# Altium PCB RS485_GPIO.PcbDoc (part 1 of 3)
Units mm, origin at the board's own origin, x right, y up, seen from the top; angles counter-clockwise.
Board outline 152.4 x 101.6 mm, 2 copper layers (Top Layer, Bottom Layer); 132 components, 100 nets, 460 pads, 0 vias.
Unrouted connection lines stored in the file: 308.
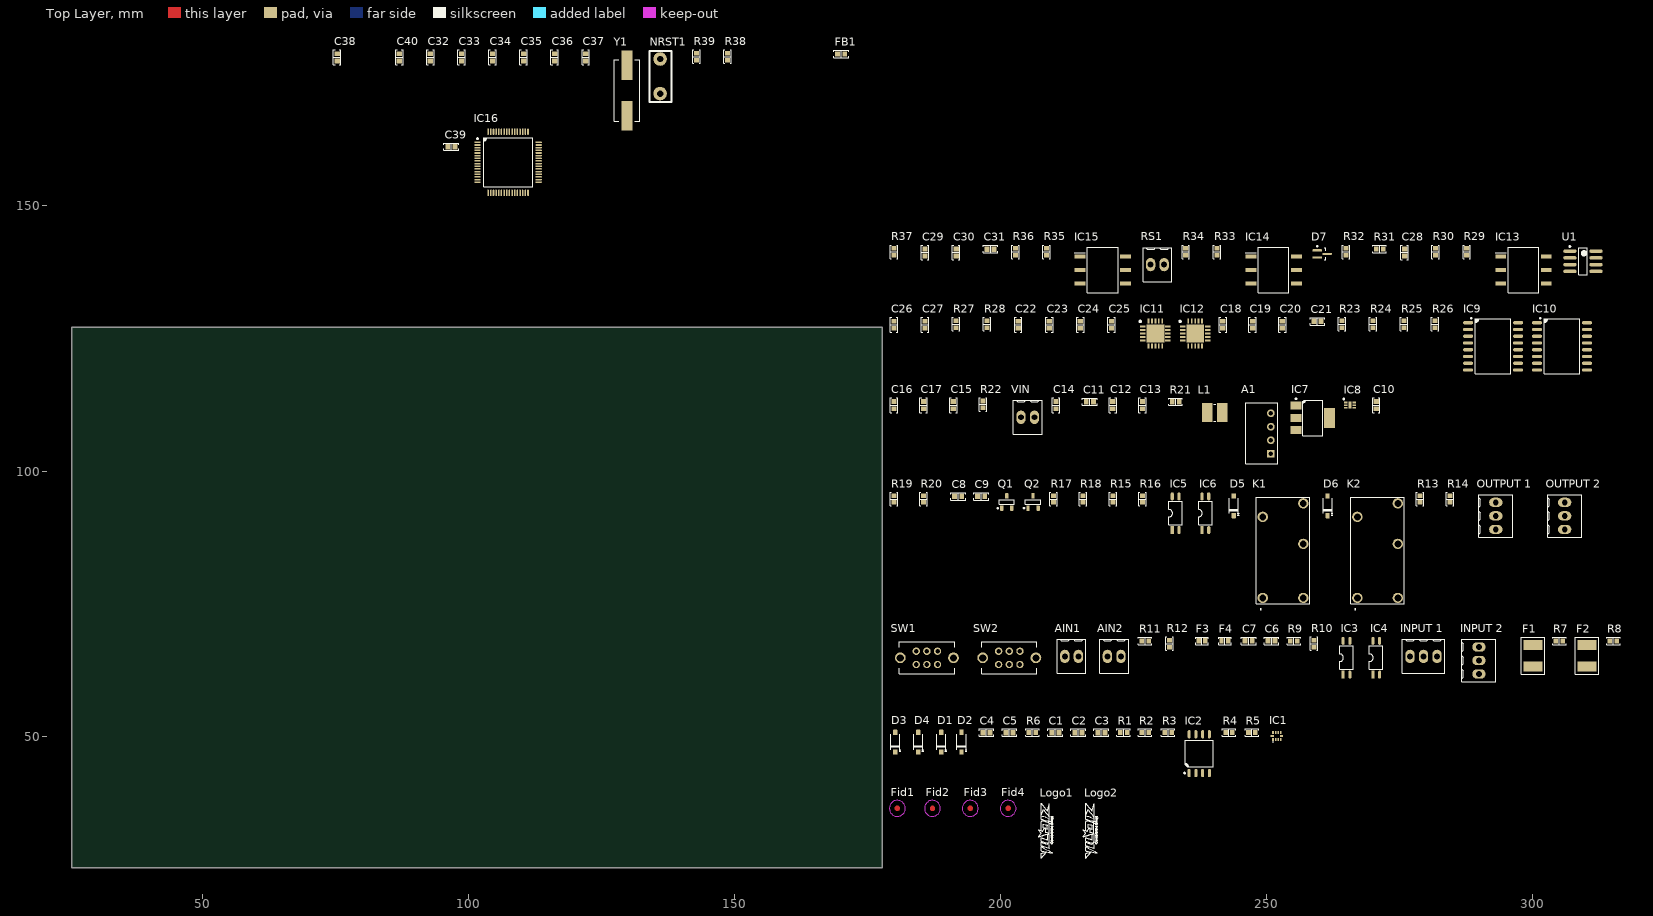
[diagram p0: Top Layer view]
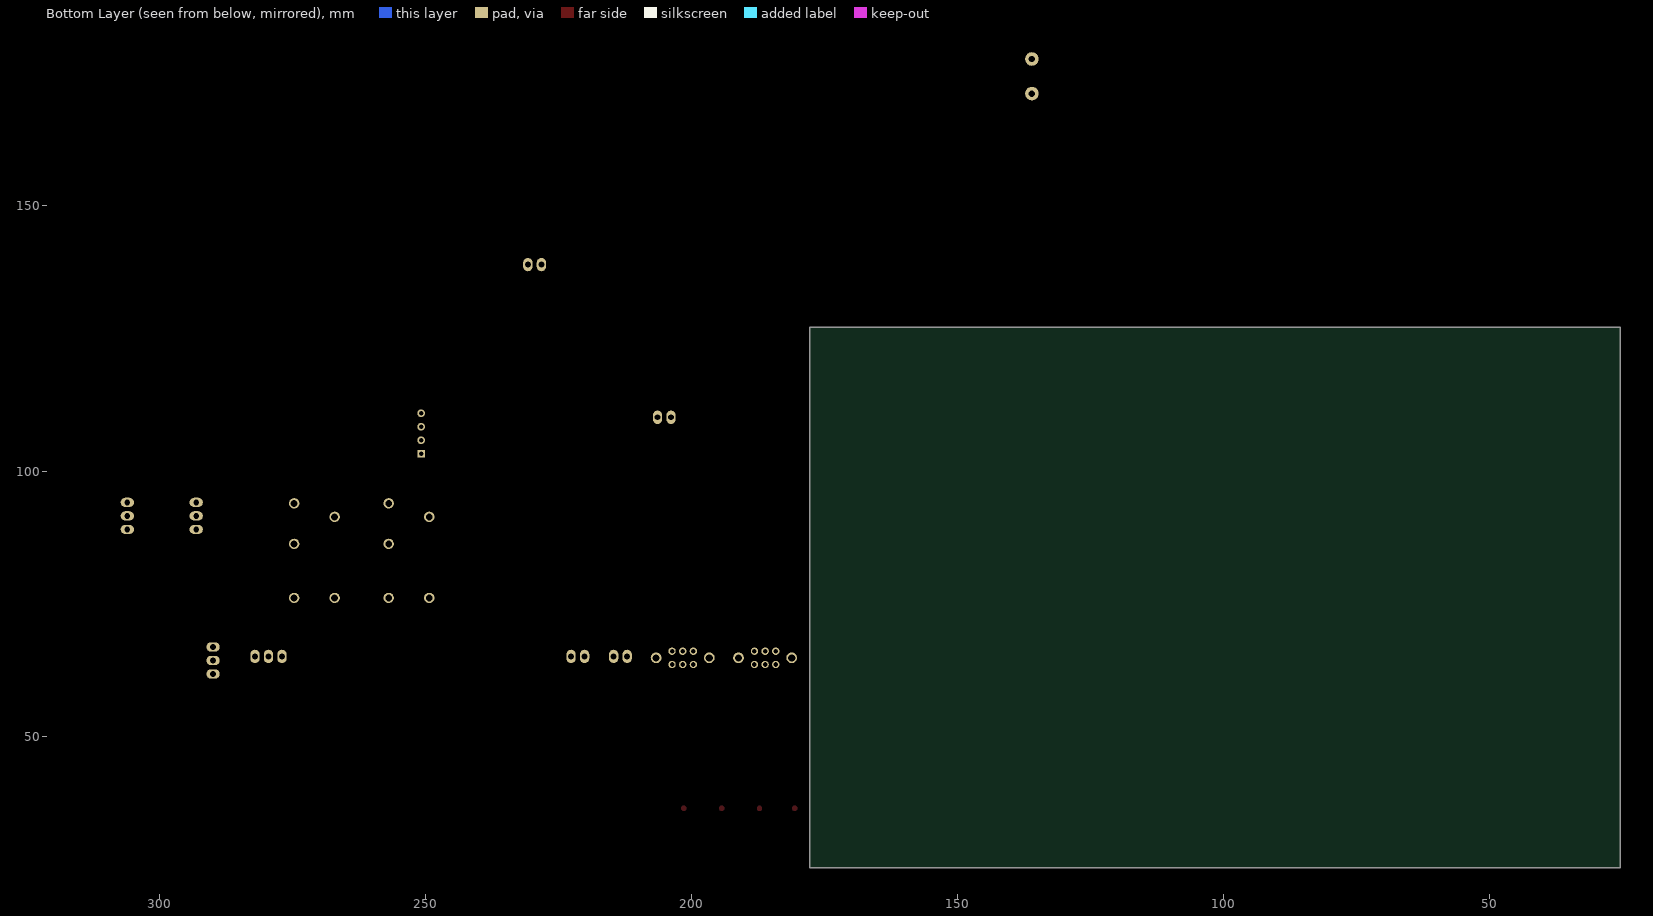
[diagram p1: Bottom Layer view, seen from below]

## Layer stack, top to bottom
Top Solder: solder mask 0.0102, Solder Resist, Dk 3.5
Top Layer: signal copper 0.0356
Dielectric 1: dielectric 0.32, FR-4, Dk 4.8
Bottom Layer: signal copper 0.0356
Bottom Solder: solder mask 0.0102, Solder Resist, Dk 3.5

## Board outline
25.4,25.4 177.8,25.4 177.8,127 25.4,127

## Design rules (kind name [scope] priority, off if disabled: settings)
Clearance [All] p1: gap=0.089 ignorepadtopadclearanceinfootprint=FALSE
DiffPairsRouting "Schematic Differential Pairs Routing" [InNetClass('RS485B')] p1: maxlimit=1 minlimit=0.127 mostfreqgap=0.3 toplayer_minwidth=0.127 toplayer_maxwidth=1 toplayer_prefwidth=0.3 bottomlayer_minwidth=0.127 bottomlayer_maxwidth=1 bottomlayer_prefwidth=0.3 maxuncoupledlength=12.7
DiffPairsRouting [All] p2: maxlimit=0.254 minlimit=0.254 mostfreqgap=0.254 toplayer_minwidth=0.381 toplayer_maxwidth=0.381 toplayer_prefwidth=0.381 bottomlayer_minwidth=0.381 bottomlayer_maxwidth=0.381 bottomlayer_prefwidth=0.381 maxuncoupledlength=12.7
PolygonConnect [All] p1: connectstyle=Relief reliefconductorwidth=0.254 reliefentries=4 polygonreliefangle="90 Angle" airgapwidth=0.254
RoomDefinition U_STM32F0 [InComponentClass('U_STM32F0')] p1: confinementstyle=ConfineIn formatcopy=TRUE lockcomponents=FALSE outline 74.26,131.004 172.812,131.004 172.812,181.971 74.26,181.971
RoomDefinition U_RS485 [InComponentClass('U_RS485')] p2: confinementstyle=ConfineIn formatcopy=TRUE lockcomponents=FALSE outline 178.943,132.842 313.944,132.842 313.944,145.288 178.943,145.288
RoomDefinition U_PT100 [InComponentClass('U_PT100')] p3: confinementstyle=ConfineIn formatcopy=TRUE lockcomponents=FALSE outline 178.943,117.856 311.658,117.856 311.658,131.699 178.943,131.699
RoomDefinition U_Power [InComponentClass('U_Power')] p4: confinementstyle=ConfineIn formatcopy=TRUE lockcomponents=FALSE outline 178.943,100.076 274.32,100.076 274.32,116.586 178.943,116.586
RoomDefinition U_Outputs [InComponentClass('U_Outputs')] p5: confinementstyle=ConfineIn formatcopy=TRUE lockcomponents=FALSE outline 178.943,72.898 314.706,72.898 314.706,98.806 178.943,98.806
RoomDefinition U_Inputs [InComponentClass('U_Inputs')] p6: confinementstyle=ConfineIn formatcopy=TRUE lockcomponents=FALSE outline 178.943,55.626 317.119,55.626 317.119,71.628 178.943,71.628
RoomDefinition U_4-20mA [InComponentClass('U_4-20mA')] p7: confinementstyle=ConfineIn formatcopy=TRUE lockcomponents=FALSE outline 178.943,41.91 254.254,41.91 254.254,54.356 178.943,54.356
RoomDefinition RS485_GPIO [InComponentClass('RS485_GPIO')] p8: confinementstyle=ConfineIn formatcopy=TRUE lockcomponents=FALSE outline 178.943,26.924 223.266,26.924 223.266,40.767 178.943,40.767
RoutingVias [All] p1: holewidth=0.711 width=1.27 viastyle="Through Hole" minholewidth=0.711 minwidth=1.27 maxholewidth=0.711 maxwidth=1.27
SolderMaskExpansion [All] p1: expansion=0.102
Width [All] p1: maxlimit=0.254 minlimit=0.254 preferedwidth=0.254
29 further rules are at their usual default settings.

## Classes and differential pairs
differential pair class RS485B: RS485B
net class RS485B: RS485B_N RS485B_P
component class U_STM32F0: C32 C33 C34 C35 C36 C37 C38 C39 C40 FB1 IC16 NRST1 R38 R39 Y1
component class U_RS485: C28 C29 C30 C31 D7 IC13 IC14 IC15 R29 R30 R31 R32 R33 R34 R35 R36 R37 RS1 U1
component class U_PT100: C18 C19 C20 C21 C22 C23 C24 C25 C26 C27 IC9 IC10 IC11 IC12 R23 R24 R25 R26 R27 R28
component class U_Power: A1 C10 C11 C12 C13 C14 C15 C16 C17 IC7 IC8 L1 R21 R22 VIN
component class U_Outputs: C8 C9 D5 D6 IC5 IC6 K1 K2 "OUTPUT 1" "OUTPUT 2" Q1 Q2 R13 R14 R15 R16 R17 R18 R19 R20
component class U_Inputs: AIN1 AIN2 C6 C7 F1 F2 F3 F4 IC3 IC4 "INPUT 1" "INPUT 2" R7 R8 R9 R10 R11 R12 SW1 SW2
component class U_4-20mA: C1 C2 C3 C4 C5 D1 D2 D3 D4 IC1 IC2 R1 R2 R3 R4 R5 R6
component class RS485_GPIO: Fid1 Fid2 Fid3 Fid4 Logo1 Logo2
differential pair RS485B: +RS485B_P -RS485B_N

## Components (designator, comment, footprint, x,y, rotation, side; value= is the part's Value field where it differs from the comment)
A1 "#NAME?" "Recom ROE1205S" 250.825,107.061 r90 top
AIN1 "2 Pin" "TE 282834-2" 213.36,65.151 r0 top
AIN2 "2 Pin" "TE 282834-2" 221.361,65.151 r0 top
C1 "100nF" "CAP 0603/1608" 210.312,50.8 r0 top
C2 "100nF" "CAP 0603/1608" 214.63,50.8 r0 top
C3 "100nF" "CAP 0603/1608" 218.948,50.8 r0 top
C4 "470nF" "CAP 0603/1608" 197.358,50.8 r0 top
C5 "470nF" "CAP 0603/1608" 201.676,50.8 r0 top
C6 "100nF" "CAP 0603/1608" 250.952,68.072 r0 top
C7 "100nF" "CAP 0603/1608" 246.634,68.072 r0 top
C8 "100nF" "CAP 0603/1608" 192.024,95.25 r0 top
C9 "100nF" "CAP 0603/1608" 196.342,95.25 r0 top
C10 "330pF" "CAP 0603/1608" 270.637,112.395 r90 top
C11 "10uF" "CAP 0603/1608" 216.789,113.03 r0 top
C12 "330nF" "CAP 0603/1608" 221.107,112.395 r90 top
C13 "1uF" "CAP 0603/1608" 226.695,112.395 r90 top
C14 "100nF" "CAP 0603/1608" 210.439,112.395 r90 top
C15 "330pF" "CAP 0603/1608" 191.135,112.395 r90 top
C16 "100nF" "CAP 0603/1608" 179.959,112.395 r90 top
C17 "1uF" "CAP 0603/1608" 185.547,112.395 r90 top
C18 "100nF" "CAP 0603/1608" 241.808,127.508 r90 top
C19 "100nF" "CAP 0603/1608" 247.396,127.508 r90 top
C20 "100nF" "CAP 0603/1608" 252.984,127.508 r90 top
C21 "100nF" "CAP 0603/1608" 259.588,128.143 r0 top
C22 "100nF" "CAP 0603/1608" 203.327,127.508 r90 top
C23 "100nF" "CAP 0603/1608" 209.169,127.508 r90 top
C24 "100nF" "CAP 0603/1608" 215.011,127.508 r90 top
C25 "100nF" "CAP 0603/1608" 220.853,127.508 r90 top
C26 "100nF" "CAP 0603/1608" 179.959,127.508 r90 top
C27 "100nF" "CAP 0603/1608" 185.801,127.508 r90 top
C28 "100nF" "CAP 0603/1608" 275.971,141.097 r90 top
C29 "100nF" "CAP 0603/1608" 185.801,141.097 r90 top
C30 "100nF" "CAP 0603/1608" 191.643,141.097 r90 top
C31 "100nF" "CAP 0603/1608" 198.12,141.732 r0 top
C32 "100nF" "CAP 0603/1608" 92.802,177.78 r90 top
C33 "100nF" "CAP 0603/1608" 98.644,177.78 r90 top
C34 "100nF" "CAP 0603/1608" 104.486,177.78 r90 top
C35 "4.7uF" "CAP 0603/1608" 110.328,177.78 r90 top
C36 "1uF" "CAP 0603/1608" 116.17,177.78 r90 top
C37 "10nF" "CAP 0603/1608" 122.012,177.78 r90 top
C38 "100nF" "CAP 0603/1608" 75.276,177.78 r90 top
C39 "18pF" "CAP 0603/1608" 96.739,160.976 r0 top
C40 "18pF" "CAP 0603/1608" 86.96,177.78 r90 top
D1 "#NAME?" sod123 188.849,49.022 r90 top
D2 "#NAME?" sod123 192.659,49.022 r90 top
D3 "#NAME?" sod123 180.213,49.022 r90 top
D4 "#NAME?" sod123 184.531,49.022 r90 top
D5 "#NAME?" sod123 243.84,93.472 r90 top
D6 "#NAME?" sod123 261.493,93.472 r90 top
D7 "#NAME?" sc70-3 260.477,140.843 r0 top
F1 "#NAME?" L_1812 300.101,65.278 r90 top
F2 "#NAME?" L_1812 310.261,65.278 r90 top
F3 "#NAME?" "NTC 0603_1608" 237.871,68.072 r0 top
F4 "#NAME?" "NTC 0603_1608" 242.189,68.072 r0 top
FB1 "#NAME?" "FER 0603/1608" 170.018,178.415 r0 top
Fid1 "Fiducial mark" Fiducial 180.594,36.576 r0 top
Fid2 "Fiducial mark" Fiducial 187.198,36.576 r90 top
Fid3 "Fiducial mark" Fiducial 194.31,36.576 r90 top
Fid4 "Fiducial mark" Fiducial 201.422,36.576 r90 top
IC1 "#NAME?" "TI X2QFN-10 2x1.5mm" 251.968,50.165 r0 top
IC2 "#NAME?" "MICROCHIP SOIC-8 208MIL WIDE" 237.363,46.863 r90 top
IC3 "EL3H7(B)(TA)-VG" EL3H7-VG 265.049,64.897 r90 top
IC4 "EL3H7(B)(TA)-VG" EL3H7-VG 270.637,64.897 r90 top
IC5 "EL3H7(B)(TA)-VG" EL3H7-VG 232.918,92.075 r90 top
IC6 "EL3H7(B)(TA)-VG" EL3H7-VG 238.506,92.075 r90 top
IC7 "#NAME?" "TI SOT-223 DCY" 258.699,109.982 r0 top
IC8 "#NAME?" "MICREL MLF-6 1.6x1.6MM" 265.684,112.395 r0 top
IC9 "#NAME?" "SI LABS SOIC-16 WIDE" 292.608,123.444 r0 top
IC10 "#NAME?" "SI LABS SOIC-16 WIDE" 305.562,123.444 r0 top
IC11 "#NAME?" "MAXIM QFN-20 5x5mm" 229.108,125.857 r0 top
IC12 "#NAME?" "MAXIM QFN-20 5x5mm" 236.601,125.857 r0 top
IC13 "H11L1SVM" "H11L1S SOP-6" 298.323,137.795 r0 top
IC14 "H11L1SVM" "H11L1S SOP-6" 251.333,137.795 r0 top
IC15 "H11L1SVM" "H11L1S SOP-6" 219.202,137.795 r0 top
IC16 "#NAME?" "ST LQFP-64 10x10mm" 107.407,158.055 r0 top
"INPUT 1" "Part Number" "TE 282834-3" 279.527,65.151 r0 top
"INPUT 2" "Part Number" "TE 282834-3" 289.941,64.389 r90 top
K1 "#NAME?" ALQ105 253.111,84.582 r90 top
K2 "#NAME?" ALQ105 270.891,84.582 r90 top
L1 "22µH" "Recom RLS226" 240.284,110.998 r0 top
Logo1 "Logo symbol" LOGO_YILDIZIOT 207.645,27.178 r90 top
Logo2 "Logo symbol" LOGO_YILDIZIOT 216.027,27.178 r90 top
NRST1 "Button" Button_Mini 135.982,174.224 r0 top
"OUTPUT 1" "Header" "TE 282834-3" 293.116,91.567 r90 top
"OUTPUT 2" "Header" "TE 282834-3" 306.07,91.567 r90 top
Q1 "#NAME?" SOT23-3 201.168,94.234 r0 top
Q2 "#NAME?" SOT23-3 206.121,94.234 r0 top
R1 "100R" "RES 0603/1608" 223.139,50.8 r0 top
R2 "1.1kR" "RES 0603/1608" 227.203,50.8 r0 top
R3 "1.1kR" "RES 0603/1608" 231.521,50.8 r0 top
R4 "1.1kR" "RES 0603/1608" 242.951,50.8 r0 top
R5 "1.1kR" "RES 0603/1608" 247.269,50.8 r0 top
R6 "100R" "RES 0603/1608" 205.994,50.8 r0 top
R7 "10kR" "RES 0603/1608" 305.054,68.072 r0 top
R8 "10kR" "RES 0603/1608" 315.214,68.072 r0 top
R9 "560R" "RES 0603/1608" 255.143,68.072 r0 top
R10 "560R" "RES 0603/1608" 258.953,67.564 r90 top
R11 "150R" "RES 0603/1608" 227.203,68.072 r0 top
R12 "150R" "RES 0603/1608" 231.775,67.564 r90 top
R13 "NC" "RES 0603/1608" 278.892,94.742 r90 top
R14 "NC" "RES 0603/1608" 284.48,94.742 r90 top
R15 "560R" "RES 0603/1608" 221.107,94.742 r90 top
R16 "560R" "RES 0603/1608" 226.695,94.742 r90 top
R17 "1kR" "RES 0603/1608" 209.931,94.742 r90 top
R18 "1kR" "RES 0603/1608" 215.519,94.742 r90 top
R19 "10kR" "RES 0603/1608" 179.959,94.742 r90 top
R20 "10kR" "RES 0603/1608" 185.547,94.742 r90 top
R21 "14kR" "RES 0603/1608" 232.918,113.03 r0 top
R22 "10kR" "RES 0603/1608" 196.723,112.522 r90 top
R23 "10kR" "RES 0603/1608" 264.16,127.635 r90 top
R24 "10kR" "RES 0603/1608" 270.002,127.635 r90 top
R25 "10kR" "RES 0603/1608" 275.844,127.635 r90 top
R26 "10kR" "RES 0603/1608" 281.686,127.635 r90 top
R27 "400R" "RES 0603/1608" 191.643,127.635 r90 top
R28 "400R" "RES 0603/1608" 197.485,127.635 r90 top
R29 "10kR" "RES 0603/1608" 287.655,141.224 r90 top
R30 "348R" "RES 0603/1608" 281.813,141.224 r90 top
R31 "10R" "RES 0603/1608" 271.272,141.732 r0 top
R32 "10R" "RES 0603/1608" 264.922,141.224 r90 top
R33 "10kR" "RES 0603/1608" 240.665,141.224 r90 top
R34 "348R" "RES 0603/1608" 234.823,141.224 r90 top
R35 "10kR" "RES 0603/1608" 208.661,141.224 r90 top
R36 "348R" "RES 0603/1608" 202.819,141.224 r90 top
R37 "120R" "RES 0603/1608" 179.959,141.224 r90 top
R38 "560R" "RES 0603/1608" 148.682,177.907 r90 top
R39 "10kR" "RES 0603/1608" 142.84,177.907 r90 top
RS1 "2 Pin" "TE 282834-2" 229.489,138.811 r0 top
SW1 "#NAME?" "SK-22D01-MG 5 NS" 184.15,63.627 r0 top
SW2 "#NAME?" "SK-22D01-MG 5 NS" 199.644,63.627 r0 top
U1 "#NAME?" SOIC8 309.499,139.446 r0 top
VIN "2 Pin" "TE 282834-2" 205.105,110.109 r0 top
Y1 "8MHz" "ABRACON ABLS" 129.759,171.557 r90 top

## Footprints (in the part's own frame and the unit in brackets; to place one, negate y for a bottom-side part, rotate by r counter-clockwise, add the part's x,y. Pads: shape width x height; smd on the part's side, far side on the other; paste and mask are expansions set on the pad)
"ABRACON ABLS" [mm] "Crystal, 2-Leads, Body 4.70x11.40mm, Pitch 8.80mm, IPC Medium Density"
  rect 5.6x2.1 smd: 1(-4.75,0) 2(4.75,0)
  silkscreen extent -5.77,-2.43 5.77,2.43, body extent -6.35,-2.35 6.35,2.35, height 4.2
ALQ105 [mm] "ALQ (LQ) series: 1 Form C, 10A Small Power Relays"
  round 1.95 hole 1.3: 1(-8.44,3.81) 2(6.8,3.81) 3(9.34,-3.81) 4(1.72,-3.81) 5(-8.44,-3.81)
  silkscreen extent -10.65,-5 10.45,5, body extent -9.55,-5 10.45,5, height 15
Button_Mini [mm]
  round 2.54 / inner round 1.2 / far side round 2.54 hole 1.2: 1(0,-3.25) 2(0,3.25)
  silkscreen extent -2.02,-4.86 2.15,4.79, body extent -1.4,-3.1 1.6,2.9, height 4.26
"CAP 0603/1608" [mm] "Chip Capacitor, 2-Leads, Body 1.60x0.80mm, IPC Medium Density"
  rect 0.9x1 smd: 1(-0.675,0) 2(0.675,0)
  silkscreen extent -1.4,-0.7 1.4,0.7, body extent -0.8,-0.41 0.8,0.41, height 0.82
EL3H7-VG [mm]
  rect 1.5x0.6 smd: 1(-3.175,0.635)
  oval 1.5x0.6 smd: 2(-3.175,-0.635) 3(3.175,-0.635) 4(3.175,0.635)
  silkscreen extent -2.17,-1.27 2.22,1.27, body extent -3.45,-1.38 3.55,1.32, height 2
"FER 0603/1608" [mm] "Chip Ferrite, 2-Leads, Body 1.60x0.80mm, IPC Medium Density"
  rect 0.9x1 smd: 1(-0.675,0) 2(0.675,0)
  silkscreen extent -1.4,-0.7 1.4,0.7, body extent -0.8,-0.41 0.8,0.41, height 0.82
Fiducial [mm] "Electrolitic Radial Capacitor, 5mm pin space, 0.8mm Hole, 10.1mm diametre, 15.2 height"
  Top Layer circle w1: c0,0 r0
  Top Layer keep-out circle w0.01: c0,0 r1.5
"H11L1S SOP-6" [mm]
  rect 2.05x0.7 smd: 1(-4.275,2.54) 2(-4.275,0) 3(-4.275,-2.54) 4(4.275,-2.54) 5(4.275,0) 6(4.275,2.54)
  silkscreen extent -5.3,-4.26 2.9,4.26, body extent -4.58,-4.26 4.58,4.26, height 5.08
L_1812 [mil] "SMD fuse"
  rect 72x142 smd: 1(-79,0) 2(79,0)
  silkscreen extent -138,-89 138,88, body extent -98,-63 98,63, height 39
LOGO_YILDIZIOT [mm] "YýLDýZ IoT Logo"
  silkscreen extent 0.02,-2.27 10.31,0.53
"MAXIM QFN-20 5x5mm" [mm]
  rect 1x0.35 smd: 1(-2.35,1.3) 2(-2.35,0.65) 3(-2.35,0) 4(-2.35,-0.65) 5(-2.35,-1.3) 11(2.35,-1.3) 12(2.35,-0.65) 13(2.35,0) 14(2.35,0.65) 15(2.35,1.3)
  rect 0.35x1 smd: 6(-1.3,-2.35) 7(-0.65,-2.35) 8(0,-2.35) 9(0.65,-2.35) 10(1.3,-2.35) 16(1.3,2.35) 17(0.65,2.35) 18(0,2.35) 19(-0.65,2.35) 20(-1.3,2.35)
  rect 3.35x3.35 smd: 21(0,0)
  silkscreen extent -3.01,2.11 -2.69,2.44, body extent -2.51,-2.51 2.51,2.51, height 0.88
"MICREL MLF-6 1.6x1.6MM" [mm] "6-UFDFN Exposed Pad, 6-TMLF®"
  rect 0.7x0.3 smd: 1(-0.8,0.5) 2(-0.8,0) 3(-0.8,-0.5) 4(0.8,-0.5) 5(0.8,0) 6(0.8,0.5)
  rect 0.55x1.31 smd: 7(0,0)
  silkscreen extent -1.27,1.03 -1.02,1.27, body extent -0.85,-0.8 0.85,0.8, height 0.6
"MICROCHIP SOIC-8 208MIL WIDE" [mm] "SOIC, 8-Leads, Body 5.28x5.28mm, Pitch 1.27mm, IPC Medium Density"
  oval 1.55x0.6 smd: 1(-3.65,1.905) 2(-3.65,0.635) 3(-3.65,-0.635) 4(-3.65,-1.905) 5(3.65,-1.905) 6(3.65,-0.635) 7(3.65,0.635) 8(3.65,1.905)
  silkscreen extent -3.77,-2.65 2.47,2.88, body extent -4.01,-2.64 4.01,2.64, height 1.5
"NTC 0603_1608" [mm] "NTC Thermistor, 2-Leads, Body 1.60x0.80mm, IPC Medium Density"
  rect 0.8x1 smd: 1(-0.625,0) 2(0.625,0)
  silkscreen extent -1.2,-0.7 1.2,0.7, body extent -0.8,-0.41 0.8,0.41, height 0.82
"Recom RLS226" [mm]
  rect 2x3.5 smd: 1(-1.4,0) 2(1.4,0)
  silkscreen extent -0.2,-1.6 0.2,1.6, body extent -2.25,-1.6 2.25,1.6, height 2.59
"Recom ROE1205S" [mm]
  rect 1.43x1.43 hole 0.88: 1(-3.81,0)
  round 1.43 hole 0.88: 2(-1.27,0) 3(1.27,0) 4(3.81,0)
  silkscreen extent -5.71,-1.25 5.79,4.75, body extent -5.76,-1.3 5.74,4.7, height 9.5
"RES 0603/1608" [mm] "Chip Resistor, 2-Leads, Body 1.60x0.80mm, IPC Medium Density"
  rect 0.85x0.95 smd: 1(-0.65,0) 2(0.65,0)
  silkscreen extent -1.27,-0.7 1.27,0.7, body extent -0.8,-0.4 0.8,0.4, height 0.45
sc70-3 [mm] "SC70-3, 3-Leads, Body 2,3x2,4mm (max), Pitch 0,66mm, IPC Low Density"
  rrect40% 1.75x0.4 smd: 1(-0.925,0.66) 2(-0.925,-0.66) 3(0.925,0)
  silkscreen extent -1.05,-1.1 0.67,1.53, body extent -1.15,-1.05 1.15,1.05, height 1
"SI LABS SOIC-16 WIDE" [mm] "SOIC, 16-Leads, Body 10.30x7.50mm, Pitch 1.27mm, IPC Medium Density"
  oval 1.9x0.6 smd: 1(-4.7,4.445) 2(-4.7,3.175) 3(-4.7,1.905) 4(-4.7,0.635) 5(-4.7,-0.635) 6(-4.7,-1.905) 7(-4.7,-3.175) 8(-4.7,-4.445) 9(4.7,-4.445) 10(4.7,-3.175) 11(4.7,-1.905) 12(4.7,-0.635) 13(4.7,0.635) 14(4.7,1.905) 15(4.7,3.175) 16(4.7,4.445)
  silkscreen extent -4.22,-5.15 3.35,5.42, body extent -5.16,-5.15 5.16,5.15, height 2.65
"SK-22D01-MG 5 NS" [mm]
  round 1.381 hole 0.85: 1(0,0) 2(2,0) 3(4,0) 4(0,2.5) 5(2,2.5) 6(4,2.5)
  round 2.025 hole 1.35: 7(-3,1.25) 8(7,1.25)
  silkscreen extent -3.2,-1.75 7.2,4.25, body extent -3.5,-6.74 7.2,4.27, height 5.6
sod123 [mm] "SOD-123; 2 Leads; Body 2.7 x 1.6 mm, (LxW)"
  round 0.508 on Mech14: 0(0,0)
  rrect25% 1x0.8 smd: 1(1.85,0) 2(-1.85,0)
  silkscreen extent -1.75,-1 1.45,0.85, body extent -1.95,-0.9 1.95,0.9, height 1.18
SOIC8 [mm] "SOIC, 8-Leads, Body 5,0x4,0mm (max), Pitch 1,27mm, IPC Low Density"
  oval 2.5x0.65 smd: 1(-2.45,1.905) 2(-2.45,0.635) 3(-2.45,-0.635) 4(-2.45,-1.905) 5(2.45,-1.905) 6(2.45,-0.635) 7(2.45,0.635) 8(2.45,1.905)
  silkscreen extent -2.57,-2.5 0.8,2.9, body extent -3,-2.45 3,2.45, height 1.75
SOT23-3 [mm] "SOT23, 3 pin"
  rrect25% 0.6x1 smd: 1(-0.95,-1.2) 2(0.95,-1.2) 3(0,1.1)
  silkscreen extent -1.81,-1.3 1.45,0.33, body extent -1.45,-1.45 1.45,1.35, height 1.29
"ST LQFP-64 10x10mm" [mm] "LQFP, 64-Leads, Body 10.00x10.00mm, Pitch 0.50mm, IPC Medium Density"
  oval 1.2x0.3 smd: 1(-5.75,3.75) 2(-5.75,3.25) 3(-5.75,2.75) 4(-5.75,2.25) 5(-5.75,1.75) 6(-5.75,1.25) 7(-5.75,0.75) 8(-5.75,0.25) 9(-5.75,-0.25) 10(-5.75,-0.75) 11(-5.75,-1.25) 12(-5.75,-1.75) 13(-5.75,-2.25) 14(-5.75,-2.75) 15(-5.75,-3.25) 16(-5.75,-3.75) 33(5.75,-3.75) 34(5.75,-3.25) 35(5.75,-2.75) 36(5.75,-2.25) 37(5.75,-1.75) 38(5.75,-1.25) 39(5.75,-0.75) 40(5.75,-0.25) 41(5.75,0.25) 42(5.75,0.75) 43(5.75,1.25) 44(5.75,1.75) 45(5.75,2.25) 46(5.75,2.75) 47(5.75,3.25) 48(5.75,3.75)
  oval 0.3x1.2 smd: 17(-3.75,-5.75) 18(-3.25,-5.75) 19(-2.75,-5.75) 20(-2.25,-5.75) 21(-1.75,-5.75) 22(-1.25,-5.75) 23(-0.75,-5.75) 24(-0.25,-5.75) 25(0.25,-5.75) 26(0.75,-5.75) 27(1.25,-5.75) 28(1.75,-5.75) 29(2.25,-5.75) 30(2.75,-5.75) 31(3.25,-5.75) 32(3.75,-5.75) 49(3.75,5.75) 50(3.25,5.75) 51(2.75,5.75) 52(2.25,5.75) 53(1.75,5.75) 54(1.25,5.75) 55(0.75,5.75) 56(0.25,5.75) 57(-0.25,5.75) 58(-0.75,5.75) 59(-1.25,5.75) 60(-1.75,5.75) 61(-2.25,5.75) 62(-2.75,5.75) 63(-3.25,5.75) 64(-3.75,5.75)
  silkscreen extent -5.87,-4.6 4.6,4.6, body extent -6.01,-6.01 6.01,6.01, height 1.6
"TE 282834-2" [mm]
  oval 1.75x2.5 hole 1.1: 1(-1.27,0) 2(1.27,0)
  silkscreen extent -2.7,-3.2 2.7,3.2, body extent -2.77,-3.25 2.77,3.25, height 10
"TE 282834-3" [mm]
  oval 1.75x2.5 hole 1.1: 1(-2.54,0) 2(0,0) 3(2.54,0)
  silkscreen extent -3.97,-3.2 3.97,3.2, body extent -4.04,-3.25 4.04,3.25, height 10
"TI SOT-223 DCY" [mm] "SOT223, 4-Leads, Body 6.50x7.00mm (avg), Pitch 2.30mm, IPC Medium Density"
  rect 2x1.5 smd: 1(-3.15,2.3) 2(-3.15,0) 3(-3.15,-2.3)
  rect 2x3.8 smd: 4(3.15,0)
  silkscreen extent -3.27,-3.35 1.85,3.72, body extent -3.52,-3.25 3.5,3.25, height 1.8
"TI X2QFN-10 2x1.5mm" [mm]
  rect 0.3x0.58 smd: 1(-0.75,-0.64) 2(-0.25,-0.64) 3(0.25,-0.64) 4(0.75,-0.64) 6(0.75,0.64) 7(0.25,0.64) 8(-0.25,0.64) 9(-0.75,0.64)
  rect 0.63x0.35 smd: 5(0.86,0) 10(-0.86,0)
  silkscreen extent -0.8,-1.15 -0.7,-1.05, body extent -1,-0.75 1,0.75, height 0.59

## Part data
A1: library part "RECOM ROE-XXYYS", "Power Supply", Case/Package=SIP, Isolation Voltage=1kV, Manufacturer=Recom, Manufacturer Part Number=ROE-2405S, Max Input Voltage=26.4V, Max Operating Temperature=85°C, Max Output Current=200mA, Max Output Voltage=5V, Max Power Dissipation=1W, Min Input Voltage=21.6V, Min Operating Temperature=-40°C, Supplier Part Number 1=ROE-2405S-ND, ComponentLink1Description=http://www.farnell.com/datasheets/2330853.pdf?src-supplier=Farnell, ComponentLink1URL=http://www.farnell.com/datasheets/2330853.pdf?src-supplier=Farnell, ComponentLink2Description=http://www.farnell.com/datasheets/2330853.pdf?src-supplier=Newark, ComponentLink2URL=http://www.farnell.com/datasheets/2330853.pdf?src-supplier=Newark, ComponentLink3Description=https://www.recom-power.com/pdf/Econoline/ROE.pdf?src-supplier=Digi-Key, ComponentLink3URL=https://www.recom-power.com/pdf/Econoline/ROE.pdf?src-supplier=Digi-Key, Efficiency=80%, Height=10mm, Lead Free="Lead Free", Length=11.5mm, Mount="Through Hole", Number of Outputs=1, Packaging=Rail/Tube, Pricing 1="1 = 3,20000, 5 = 3,15600, 10 = 3,11100, 25 = 3,01960, 50 = 2,92800, 100 = 2,83650, 250 = 2,74500, 500 = 2,56200 (USD)", RoHS=Yes, Stock 1=6478, Supplier 1=Digi-Key, Voltage - Output 1=5V, Weight=1.4g, Width=6mm
AIN1 AIN2 RS1 VIN: Color=Green, Current=10A, Flammability Rating="UL94 V-0", Manufacturer="TE Connectivity", Manufacturer Part Number=282834-2, Max Operating Temperature=105°C, Max Supply Voltage (AC)=150V, Min Operating Temperature=-40°C, Package Quantity=300, Supplier Part Number 1=A98333-ND, Approvals=UL, Closed End="No (Without)", ComponentLink1Description=https://datasheet.ciiva.com/11758/0900766b80e7dc96-11758675.pdf?src-supplier=RSComponents, ComponentLink1URL=https://datasheet.ciiva.com/11758/0900766b80e7dc96-11758675.pdf?src-supplier=RSComponents, ComponentLink2Description=https://datasheet.ciiva.com/16386/282834-2-16386363.pdf?src-supplier=Future+Electronics, ComponentLink2URL=https://datasheet.ciiva.com/16386/282834-2-16386363.pdf?src-supplier=Future+Electronics, ComponentLink3Description=https://datasheet.ciiva.com/14609/70086732-14609670.pdf?src-supplier=Allied+Electronics, ComponentLink3URL=https://datasheet.ciiva.com/14609/70086732-14609670.pdf?src-supplier=Allied+Electronics, ComponentLink4Description=https://datasheet.ciiva.com/15169/getdatasheetpartid-155864-15169558.pdf?src-supplier=Verical, ComponentLink4URL=https://datasheet.ciiva.com/15169/getdatasheetpartid-155864-15169558.pdf?src-supplier=Verical, ComponentLink5Description=https://datasheet.ciiva.com/3141/eng-cs-1308389-eurostyle-terminal-blocks-0607-3141115.pdf?src-supplier=Avnet, ComponentLink5URL=https://datasheet.ciiva.com/3141/eng-cs-1308389-eurostyle-terminal-blocks-0607-3141115.pdf?src-supplier=Avnet, ComponentLink6Description=https://datasheet.ciiva.com/823/eng-cd-282834-c1-823453.pdf?src-supplier=Digi-Key, ComponentLink6URL=https://datasheet.ciiva.com/823/eng-cd-282834-c1-823453.pdf?src-supplier=Digi-Key, ComponentLink7Description=https://datasheet.ciiva.com/16676/eng-cs-1308389-eurostyle-terminal-blocks-0607-16676126.pdf?src-supplier=Avnet+Europe, ComponentLink7URL=https://datasheet.ciiva.com/16676/eng-cs-1308389-eurostyle-terminal-blocks-0607-16676126.pdf?src-supplier=Avnet+Europe, ComponentLink8Description=https://datasheet.ciiva.com/30166/eng-cs-1308389-eurostyle-terminal-blocks-0607-30166974.pdf?src-supplier=Onlinecomponents.com, ComponentLink8URL=https://datasheet.ciiva.com/30166/eng-cs-1308389-eurostyle-terminal-blocks-0607-30166974.pdf?src-supplier=Onlinecomponents.com, Connector Type=Receptacle, Contact Material=Brass, Contact Plating=Tin, Current Rating=10A, Depth=6.5mm, ELV=Compliant, Gender=Male, Housing Color=Green, Housing Material=Polyamide, Interlock="No (Without)", Lead Free="Lead Free", Length=5.54mm, Material=Nylon, Max Current Rating=10A, Max Voltage Rating (AC)=150V, Mount="Through Hole", Number of Circuits=2, Number of Contacts=2, Number of Levels=1, Number of Poles=2, Number of Positions=2, Number of Positions Per Level=2, Number of Rows=1, Orientation=Straight, Packaging=Bulk, Pitch=2.54mm, Plating=Brass,Steel, Pricing 1="1 = 0,89000, 10 = 0,62600, 25 = 0,58360, 50 = 0,52980, 100 = 0,52740, 250 = 0,44536, 500 = 0,42192, 1000 = 0,37504, 5000 = 0,35160 (USD)", Radiation Hardening=No, REACH SVHC=Unknown, RoHS=Yes, Screw Flange="No (Without)", Screwless Terminal Block="Yes (With)", Side Stackable="Yes (With)", Stock 1=19973, Supplier 1=Digi-Key, Tail Length=3.4mm, Termination=Solder, Thread Size=M1.6, Voltage=150V, Voltage Rating=150V, Width=6.5mm, Wire/Cable Gauge=30AWG, Wire Gauge (Max)=30AWG, Wire Gauge (Min)=30AWG
C1 C2 C3 C6 C7 C8 C9 C14 C16 C18 C19 C20 C21 C22 C23 C24 C25 C26 C27 C32 C33 C34 C38: library part "Capacitor - Ceramic", "Ceramic, SMT Capacitor", Case/Package=0603, Case Code (Metric)=1608, Dielectric=X7R, Manufacturer=Samsung, Manufacturer Part Number=CL10B104JB8NNNC, Max Operating Temperature=125°C, Min Operating Temperature=-55°C, Package Quantity=1, Supplier Part Number 1=1276-1033-1-ND, Tolerance=5%, Voltage=50V, Capacitance=100nF, Case Code (Imperial)=0603, ComponentLink1Description=https://media.digikey.com/pdf/Data%20Sheets/Samsung%20PDFs/CL_Series_MLCC_ds.pdf?src-supplier=Digi-Key, ComponentLink1URL=https://media.digikey.com/pdf/Data%20Sheets/Samsung%20PDFs/CL_Series_MLCC_ds.pdf?src-supplier=Digi-Key, ComponentLink2Description=https://www.verical.com/server-webapp/html/getDatasheet?partID=359321&src-supplier=Verical, ComponentLink2URL=https://www.verical.com/server-webapp/html/getDatasheet?partID=359321&src-supplier=Verical, ComponentLink3Description=http://www1.futureelectronics.com/doc/SAMSUNG/CL10B104JB8NNNC.pdf?src-supplier=Future+Electronics, ComponentLink3URL=http://www1.futureelectronics.com/doc/SAMSUNG/CL10B104JB8NNNC.pdf?src-supplier=Future+Electronics, ComponentLink4Description=https://produktinfo.conrad.com/datenblaetter/450000-474999/456613-da-01-en-VS_KONDENSATOR_0603.pdf?src-supplier=Conrad, ComponentLink4URL=https://produktinfo.conrad.com/datenblaetter/450000-474999/456613-da-01-en-VS_KONDENSATOR_0603.pdf?src-supplier=Conrad, Contact Plating=Tin, Depth=0.8mm, Height=0.8mm, Length=1.6mm, Material=Ceramic, Mount="Surface Mount", Packaging="Tape and Reel", Pricing 1="1 = 0,10000, 10 = 0,05300, 100 = 0,02350, 500 = 0,01680, 1000 = 0,01320 (USD)", Radiation Hardening=No, RoHS=Yes, Stock 1=223594, Supplier 1=Digi-Key, Thickness=0.035inch, Voltage Rating=50V, Width=0.031inch
C4 C5: library part "Capacitor - Ceramic", "Ceramic, SMT Capacitor", Case/Package=0603, Case Code (Metric)=1608, Dielectric=X5R, Manufacturer="Taiyo Yuden", Manufacturer Part Number=UMK107ABJ474KA-T, Max Operating Temperature=85°C, Min Operating Temperature=-55°C, Package Quantity=1, Supplier Part Number 1=587-3171-1-ND, Tolerance=10%, Voltage=50V, Capacitance=470nF, Case Code (Imperial)=0603, ComponentLink1Description=https://datasheet.ciiva.com/30226/445umk107abj474ka-t-30226784.pdf?src-supplier=Onlinecomponents.com, ComponentLink1URL=https://datasheet.ciiva.com/30226/445umk107abj474ka-t-30226784.pdf?src-supplier=Onlinecomponents.com, ComponentLink2Description=https://datasheet.ciiva.com/6282/umk107abj474ka-t-6282326.pdf?src-supplier=Digi-Key, ComponentLink2URL=https://datasheet.ciiva.com/6282/umk107abj474ka-t-6282326.pdf?src-supplier=Digi-Key, ComponentLink3Description=https://datasheet.ciiva.com/15922/30umk107abj474ka-t-15922603.pdf?src-supplier=Onlinecomponents.com, ComponentLink3URL=https://datasheet.ciiva.com/15922/30umk107abj474ka-t-15922603.pdf?src-supplier=Onlinecomponents.com, ComponentLink4Description=https://datasheet.ciiva.com/11600/umk107abj474ka-t-ss-11600413.pdf?src-supplier=Avnet, ComponentLink4URL=https://datasheet.ciiva.com/11600/umk107abj474ka-t-ss-11600413.pdf?src-supplier=Avnet, ComponentLink5Description=https://datasheet.ciiva.com/6282/umk107abj474ka-t-6282332.pdf?src-supplier=Digi-Key, ComponentLink5URL=https://datasheet.ciiva.com/6282/umk107abj474ka-t-6282332.pdf?src-supplier=Digi-Key, Depth=0.8mm, Height=0.8mm, Lead Free="Lead Free", Length=1.6mm, Mount="Surface Mount", Packaging="Tape and Reel", Pricing 1="1 = 0,19000, 10 = 0,13700, 100 = 0,06440, 500 = 0,04516, 1000 = 0,03739 (USD)", Radiation Hardening=No, RoHS=Yes, Stock 1=299107, Supplier 1=Digi-Key, Termination=SMD/SMT, Thickness=0.037inch, Voltage Rating=50V, Voltage Rating (DC)=50V, Width=0.8mm
C10 C15: library part "Capacitor - Ceramic", "Ceramic, SMT Capacitor", Case/Package=0603, Case Code (Metric)=1608, Manufacturer=KEMET, Manufacturer Part Number=C0603C331JAGAC7867, Max Operating Temperature=125°C, Min Operating Temperature=-55°C, Supplier Part Number 1=399-14978-1-ND, Tolerance=5%, Voltage Rating=250V, Capacitance=330pF, Case Code (Imperial)=0603, ComponentLink1Description=https://api.kemet.com/component-edge/download/datasheet/C0603C331JAGAC7867.pdf?src-supplier=Digi-Key, ComponentLink1URL=https://api.kemet.com/component-edge/download/datasheet/C0603C331JAGAC7867.pdf?src-supplier=Digi-Key, Mount="Surface Mount", Packaging="Cut Tape", Pricing 1="1 = 0,10000, 10 = 0,05600, 100 = 0,02480, 500 = 0,01772, 1000 = 0,01392 (USD)", RoHS=No, Stock 1=50915, Supplier 1=Digi-Key
C11: library part "Capacitor - Ceramic", "Ceramic, SMT Capacitor", Case/Package=0603, Case Code (Metric)=1608, Dielectric=X5R, Manufacturer=Murata, Manufacturer Part Number=GRM188R6YA106MA73D, Max Operating Temperature=85°C, Min Operating Temperature=-55°C, Supplier Part Number 1=490-13248-6-ND, Tolerance=20%, Voltage Rating=35V, Capacitance=10uF, Case Code (Imperial)=0603, ComponentLink1Description=http://search.murata.co.jp/Ceramy/image/img/A01X/G101/ENG/GRM188R6YA106MA73-01.pdf?src-supplier=Digi-Key, ComponentLink1URL=http://search.murata.co.jp/Ceramy/image/img/A01X/G101/ENG/GRM188R6YA106MA73-01.pdf?src-supplier=Digi-Key, ComponentLink2Description=http://search.murata.co.jp/Ceramy/image/img/A01X/G101/ENG/GRM188R6YA106MA73-01.pdf?src-supplier=Mouser, ComponentLink2URL=http://search.murata.co.jp/Ceramy/image/img/A01X/G101/ENG/GRM188R6YA106MA73-01.pdf?src-supplier=Mouser, ComponentLink3Description=https://www.murata.com/~/media/webrenewal/support/library/catalog/products/capacitor/mlcc/c02e.ashx?la=en-us&src-supplier=Digi-Key, ComponentLink3URL=https://www.murata.com/~/media/webrenewal/support/library/catalog/products/capacitor/mlcc/c02e.ashx?la=en-us&src-supplier=Digi-Key, ComponentLink4Description=http://search.murata.co.jp/Ceramy/image/img/A01X/G101/ENG/GRM188R6YA106MA73-01.pdf?src-supplier=Future+Electronics, ComponentLink4URL=http://search.murata.co.jp/Ceramy/image/img/A01X/G101/ENG/GRM188R6YA106MA73-01.pdf?src-supplier=Future+Electronics, ComponentLink5Description=http://search.murata.co.jp/Ceramy/image/img/A01X/G101/ENG/GRM188R6YA106MA73-01.pdf?src-supplier=TTI, ComponentLink5URL=http://search.murata.co.jp/Ceramy/image/img/A01X/G101/ENG/GRM188R6YA106MA73-01.pdf?src-supplier=TTI, Length=0.063inch, Mount="Surface Mount", Packaging="Tape and Reel", Pricing 1="1 = 0,50000, 10 = 0,34600, 100 = 0,20760, 500 = 0,15570, 1000 = 0,13148 (USD)", RoHS=Yes, Stock 1=69593, Supplier 1=Digi-Key, Thickness=0.039inch, Voltage Rating (DC)=35V, Width=0.031inch
C12: library part "Capacitor - Ceramic", "Ceramic, SMT Capacitor", Case/Package=0603, Case Code (Metric)=1608, Dielectric=X5R, Manufacturer=TDK, Manufacturer Part Number=CGA3E3X5R1H334K080AB, Max Operating Temperature=85°C, Min Operating Temperature=-55°C, Package Quantity=1, Ratings=AEC-Q200, Supplier Part Number 1=445-12504-1-ND, Tolerance=10%, Voltage Rating=50V, Capacitance=330nF, Case Code (Imperial)=0603, ComponentLink1Description=http://www.farnell.com/datasheets/1936565.pdf?src-supplier=Farnell, ComponentLink1URL=http://www.farnell.com/datasheets/1936565.pdf?src-supplier=Farnell, ComponentLink2Description=http://www.mouser.com/ds/2/400/lcc_automotive_general_en-843974.pdf?src-supplier=Mouser, ComponentLink2URL=http://www.mouser.com/ds/2/400/lcc_automotive_general_en-843974.pdf?src-supplier=Mouser, ComponentLink3Description=https://product.tdk.com/info/en/catalog/datasheets/mlcc_automotive_general_en.pdf?src-supplier=Digi-Key, ComponentLink3URL=https://product.tdk.com/info/en/catalog/datasheets/mlcc_automotive_general_en.pdf?src-supplier=Digi-Key, ComponentLink4Description=http://product.tdk.com/en/catalog/datasheets/mlcc_automotive_general_en.pdf?src-supplier=Avnet, ComponentLink4URL=http://product.tdk.com/en/catalog/datasheets/mlcc_automotive_general_en.pdf?src-supplier=Avnet, ComponentLink5Description=https://product.tdk.com/info/en/documents/chara_sheet/CGA3E3X5R1H334K080AB.pdf?src-supplier=Digi-Key, ComponentLink5URL=https://product.tdk.com/info/en/documents/chara_sheet/CGA3E3X5R1H334K080AB.pdf?src-supplier=Digi-Key, Height=0.8mm, Length=0.063inch, Mount="Surface Mount", Packaging="Tape and Reel", Pricing 1="1 = 0,30000, 10 = 0,20300, 100 = 0,11500, 500 = 0,08114, 1000 = 0,07100 (USD)", RoHS=Yes, Stock 1=11251, Supplier 1=Digi-Key, Thickness=0.035inch, Voltage Rating (DC)=50V, Weight=7.1E-05oz, Width=0.031inch
C13 C17 C36: library part "Capacitor - Ceramic", "Ceramic, SMT Capacitor", Case/Package=0603, Case Code (Metric)=1608, Dielectric=X5R, Manufacturer=Samsung, Manufacturer Part Number=CL10A105KP8NNNC, Max Operating Temperature=85°C, Min Operating Temperature=-55°C, Package Quantity=1, Supplier Part Number 1=1276-1182-1-ND, Tolerance=10%, Voltage=10V, Capacitance=1uF, Case Code (Imperial)=0603, ComponentLink1Description=https://datasheet.ciiva.com/15195/getdatasheetpartid-358616-15195708.pdf?src-supplier=Verical, ComponentLink1URL=https://datasheet.ciiva.com/15195/getdatasheetpartid-358616-15195708.pdf?src-supplier=Verical, ComponentLink2Description=https://datasheet.ciiva.com/16358/cl05b104kq5nnnc-16358431.pdf?src-supplier=Future+Electronics, ComponentLink2URL=https://datasheet.ciiva.com/16358/cl05b104kq5nnnc-16358431.pdf?src-supplier=Future+Electronics, Contact Plating=Tin, Depth=0.8mm, Height=0.8mm, Length=1.6mm, Mount="Surface Mount", Packaging="Tape and Reel", Pricing 1="1 = 0,10000, 10 = 0,03800, 100 = 0,01680, 500 = 0,01200, 1000 = 0,00943 (USD)", Radiation Hardening=No, RoHS=Yes, Stock 1=4590831, Supplier 1=Digi-Key, Thickness=0.035inch, Voltage Rating=10V, Width=0.031inch
C28 C29 C30 C31: library part "Cap - Ceramic", "Capacitor, Ceramic", Case/Package=0603, Case Code (Metric)=1608, Dielectric=X5R, Manufacturer=Samsung, Manufacturer Part Number=CL10A104KA8NNNC, Max Operating Temperature=85°C, Min Operating Temperature=-55°C, Package Quantity=1, Supplier Part Number 1=1276-1857-1-ND, Tolerance=10%, Voltage Rating=25V, Capacitance=100nF, Case Code (Imperial)=0603, ComponentLink1Description=http://www.samsungsem.com/kr/support/library/product-catalog/mlcc.jsp, ComponentLink1URL=http://www.samsungsem.com/kr/support/library/product-catalog/mlcc.jsp, Contact Plating=Tin, Lead Free="Lead Free", Length=0.063inch, Mount="Surface Mount", Packaging="Tape and Reel", Price=0,1, Pricing 1="1 = 0,10000, 10 = 0,04600, 100 = 0,02070, 500 = 0,01478, 1000 = 0,01162 (USD)", RoHS=Yes, Stock 1=978306, Supplier 1=Digi-Key, Termination=Wraparound, Thickness=0.035inch, Voltage Rating (DC)=25V, Width=0.031inch
C35: library part "Capacitor - Ceramic", "Ceramic, SMT Capacitor", Case/Package=0603, Case Code (Metric)=1608, Dielectric=X5R, Manufacturer=Samsung, Manufacturer Part Number=CL10A475KO8NNNC, Max Operating Temperature=85°C, Min Operating Temperature=-55°C, Package Quantity=1, Supplier Part Number 1=1276-1784-1-ND, Tolerance=10%, Voltage=16V, Capacitance=4.7uF, Case Code (Imperial)=0603, ComponentLink1Description=http://www.samsungsem.com/kr/support/product-search/mlcc/CL10A475KO8NNNC.jsp, ComponentLink1URL=http://www.samsungsem.com/kr/support/product-search/mlcc/CL10A475KO8NNNC.jsp, ComponentLink2Description=https://www.verical.com/server-webapp/html/getDatasheet?partID=358619, ComponentLink2URL=https://www.verical.com/server-webapp/html/getDatasheet?partID=358619, ComponentLink3Description=https://produktinfo.conrad.com/datenblaetter/450000-474999/457663-da-01-en-VS_KONDENSATOR_0603.pdf, ComponentLink3URL=https://produktinfo.conrad.com/datenblaetter/450000-474999/457663-da-01-en-VS_KONDENSATOR_0603.pdf, Contact Plating=Tin, Depth=0.8mm, Height=0.8mm, Length=1.6mm, Material=Ceramic, Mount="Surface Mount", Packaging="Tape and Reel", Price=0,3, Pricing 1="1 = 0,30000, 10 = 0,20300, 100 = 0,11480, 500 = 0,08100, 1000 = 0,07088 (USD)", Radiation Hardening=No, RoHS=Yes, Stock 1=209042, Supplier 1=Digi-Key, Thickness=0.035inch, Voltage Rating=16V, Width=0.031inch
C37: library part "Capacitor - Ceramic", "Ceramic, SMT Capacitor", Case/Package=0603, Dielectric=X7R, Manufacturer=KEMET, Manufacturer Part Number=C0603C103J5RACTU, Max Operating Temperature=125°C, Min Operating Temperature=-55°C, Supplier Part Number 1=399-1092-1-ND, Tolerance=5%, Capacitance=10nF, ComponentLink1Description=https://datasheet.ciiva.com/22749/kem-c1002-x7r-smd-22749720.pdf?src-supplier=Element14, ComponentLink1URL=https://datasheet.ciiva.com/22749/kem-c1002-x7r-smd-22749720.pdf?src-supplier=Element14, ComponentLink2Description=https://datasheet.ciiva.com/26847/getdatasheetpartid-317400-26847516.pdf?src-supplier=Verical, ComponentLink2URL=https://datasheet.ciiva.com/26847/getdatasheetpartid-317400-26847516.pdf?src-supplier=Verical, Depth=0.8mm, Height=0.8mm, Length=1.6mm, Mount="Surface Mount", Packaging="Tape and Reel", Pricing 1="1 = 0,10000, 10 = 0,05300, 100 = 0,02360, 500 = 0,01682, 1000 = 0,01322 (USD)", Radiation Hardening=No, RoHS=Yes, Stock 1=659548, Supplier 1=Digi-Key
C39 C40: library part "Capacitor - Ceramic", "Ceramic, SMT Capacitor", Case/Package=0603, Case Code (Metric)=1608, Dielectric=C0G, Insulation Resistance=100GR, Manufacturer=Yageo, Manufacturer Part Number=CC0603JRNPO9BN180, Max Operating Temperature=125°C, Min Operating Temperature=-55°C, Package Quantity=1, Supplier Part Number 1=311-1061-1-ND, Temperature Coefficient=30ppm/°C, Tolerance=5%, Voltage Rating=50V, Capacitance=18pF, Case Code (Imperial)=0603, ComponentLink1Description=https://datasheet.ciiva.com/144/mlccorderingcode-144637.pdf?src-supplier=Digi-Key, ComponentLink1URL=https://datasheet.ciiva.com/144/mlccorderingcode-144637.pdf?src-supplier=Digi-Key, ComponentLink2Description=https://datasheet.ciiva.com/144/mlccorderingcode-144638.pdf?src-supplier=Digi-Key, ComponentLink2URL=https://datasheet.ciiva.com/144/mlccorderingcode-144638.pdf?src-supplier=Digi-Key, ComponentLink3Description=https://datasheet.ciiva.com/144/mlccorderingcode-144639.pdf?src-supplier=Digi-Key, ComponentLink3URL=https://datasheet.ciiva.com/144/mlccorderingcode-144639.pdf?src-supplier=Digi-Key, ComponentLink4Description=https://datasheet.ciiva.com/46430/1835847-46430152.pdf?src-supplier=Element14, ComponentLink4URL=https://datasheet.ciiva.com/46430/1835847-46430152.pdf?src-supplier=Element14, ComponentLink5Description=https://datasheet.ciiva.com/11587/upy-gp-np0-16v-to-50v-8-11587323.pdf?src-supplier=Avnet, ComponentLink5URL=https://datasheet.ciiva.com/11587/upy-gp-np0-16v-to-50v-8-11587323.pdf?src-supplier=Avnet, ComponentLink6Description=https://datasheet.ciiva.com/28450/1443161-28450477.pdf?src-supplier=Element14, ComponentLink6URL=https://datasheet.ciiva.com/28450/1443161-28450477.pdf?src-supplier=Element14, ComponentLink7Description=https://datasheet.ciiva.com/5425/upy-gp-np0-16v-to-50v-8-5425439.pdf?src-supplier=Mouser, ComponentLink7URL=https://datasheet.ciiva.com/5425/upy-gp-np0-16v-to-50v-8-5425439.pdf?src-supplier=Mouser, ComponentLink8Description=https://datasheet.ciiva.com/8033/1734582-8033733.pdf?src-supplier=Element14, ComponentLink8URL=https://datasheet.ciiva.com/8033/1734582-8033733.pdf?src-supplier=Element14, ComponentLink9Description=https://datasheet.ciiva.com/16625/upy-gp-np0-16v-to-50v-8-16625517.pdf?src-supplier=Avnet+Europe, ComponentLink9URL=https://datasheet.ciiva.com/16625/upy-gp-np0-16v-to-50v-8-16625517.pdf?src-supplier=Avnet+Europe, Composition=Ceramic, Depth=0.8mm, Height=0.8mm, Lead Free="Lead Free", Length=1.6mm, Mount="Surface Mount", Number of Pins=2, Packaging="Tape and Reel", Pricing 1="1 = 0,10000, 10 = 0,04200, 100 = 0,01870, 500 = 0,01338, 1000 = 0,01051 (USD)", Radiation Hardening=No, REACH SVHC="No SVHC", RoHS=Yes, Stock 1=236593, Supplier 1=Digi-Key, Termination=SMD/SMT, Thickness=0.035inch, Voltage Rating (DC)=50V, Width=0.031inch
D1 D2 D3 D4 D5 D6: library part Diode, "Diode", Average Rectified Current=250mA, Manufacturer=SMC, Manufacturer Part Number=1N4148WTR, Max Reverse Voltage (DC)=75V, Supplier Part Number 1=1655-1360-1-ND, ComponentLink1Description=http://www.smc-diodes.com/propdf/1N4148W%20N0571%20REV.D.pdf?src-supplier=Digi-Key, ComponentLink1URL=http://www.smc-diodes.com/propdf/1N4148W%20N0571%20REV.D.pdf?src-supplier=Digi-Key, Mount="Surface Mount", Packaging="Tape and Reel", Pricing 1="1 = 0,12000, 10 = 0,11300, 25 = 0,10720, 100 = 0,04710, 250 = 0,04524, 500 = 0,03702, 1000 = 0,02571 (USD)", Reverse Recovery Time=4ns, RoHS=No, Stock 1=8882, Supplier 1=Digi-Key
D7: library part "TVS Array", "Dual-line Transil™,  transient voltage suppressor (TVS)", Manufacturer=STMicroelectronics, Manufacturer Part Number=ESDAVLC6-2BLY, Supplier Part Number 1=497-18402-1-ND, ComponentLink1Description=http://www.farnell.com/datasheets/2645121.pdf, ComponentLink1URL=http://www.farnell.com/datasheets/2645121.pdf, ComponentLink2Description=http://www.bourns.com/docs/Product-Datasheets/CDSOT23-SM712.pdf, ComponentLink2URL=http://www.bourns.com/docs/Product-Datasheets/CDSOT23-SM712.pdf, ComponentLink3Description=https://www.bourns.com/docs/technical-documents/technical-library/circuit-protection/design-notes/bourns_rs485_evalboard4_design_note.pdf, ComponentLink3URL=https://www.bourns.com/docs/technical-documents/technical-library/circuit-protection/design-notes/bourns_rs485_evalboard4_design_note.pdf, ComponentLink4Description=http://www.farnell.com/datasheets/1670933.pdf, ComponentLink4URL=http://www.farnell.com/datasheets/1670933.pdf, Pricing 1="1 = 0,37000, 10 = 0,27800, 25 = 0,25040, 100 = 0,13200, 250 = 0,13060, 500 = 0,11694, 1000 = 0,09100 (USD)", RoHS=No, Stock 1=3205, Supplier 1=Digi-Key
F1 F2: library part "Fuse 1", "Fuse", Case/Package=1206, Case Code (Metric)=3216, Hold Current=200mA, Manufacturer=Bel, Manufacturer Part Number=0ZCJ0020FF2E, Max Current Rating=10A, Max Operating Temperature=85°C, Max Voltage Rating (DC)=30V, Min Operating Temperature=-40°C, Package Quantity=3000, Power Dissipation=400mW, Supplier Part Number 1=507-1797-1-ND, Trip Current=400mA, Approvals=TUV,UL, Case Code (Imperial)=1206, ComponentLink1Description=https://www.belfuse.com/resources/CircuitProtection/datasheets/0ZCJ%20Nov2016.pdf, ComponentLink1URL=https://www.belfuse.com/resources/CircuitProtection/datasheets/0ZCJ%20Nov2016.pdf, ComponentLink2Description=SMD, ComponentLink3Description=ESIMF110/16-2, Contact Plating=Matte,Tin, Lead Free="Lead Free", Mount="Surface Mount", Number of Terminals=2, Packaging="Cut Tape", Price=0,13, Pricing 1="1 = 0,13000, 5 = 0,13000, 10 = 0,12500, 50 = 0,11140, 100 = 0,10370, 250 = 0,09216, 500 = 0,07680, 1000 = 0,07296 (USD)", RoHS=Yes, Stock 1=381173, Supplier 1=Digi-Key, Time to Trip=0.1s
F3 F4: library part ERT-J1VK102JM, "THERM NTC 0603 (FOR AUTOMOTIVE)", Manufacturer=Bel, Manufacturer Part Number=0ZCM0003FF2G, Supplier Part Number 1=507-0ZCM0003FF2GCT-ND, ComponentLink1Description=Datasheet, ComponentLink1URL=https://industrial.panasonic.com/cdbs/www-data/pdf/AUA0000/AUA0000C11.pdf, ComponentLink2Description="DigiKey Link", ComponentLink2URL=http://digikey.com/product-detail/en/panasonic-electronic-components/ERT-J1VK102JM/P123690DKR-ND/9351505, Pricing 1="1 = 0,16000, 5 = 0,16000, 10 = 0,15200, 50 = 0,13580, 100 = 0,12640, 250 = 0,11232, 500 = 0,09360, 1000 = 0,08892 (USD)", RoHS=No, Stock 1=12, Supplier 1=Digi-Key
FB1: library part "Ferrite Chip", "SMT Ferrite Chip", Case/Package=0603, Case Code (Metric)=1608, Current Rating=500mA, DC Resistance (DCR)=380mR, Frequency=100MHz, Manufacturer=Murata, Manufacturer Part Number=BLM18AG601SN1D, Max Operating Temperature=125°C, Min Operating Temperature=-55°C, Package Quantity=1, Supplier Part Number 1=490-1014-1-ND, Tolerance=25%, Case Code (Imperial)=0603, ComponentLink1Description=https://datasheet.ciiva.com/19460/1844766-19460213.pdf?src-supplier=Jameco, ComponentLink1URL=https://datasheet.ciiva.com/19460/1844766-19460213.pdf?src-supplier=Jameco, ComponentLink2Description=https://datasheet.ciiva.com/29347/442309-da-01-en-chip-drossel-0603-600r-500ma-1-6x0-8mm-29347900.pdf?src-supplier=Conrad, ComponentLink2URL=https://datasheet.ciiva.com/29347/442309-da-01-en-chip-drossel-0603-600r-500ma-1-6x0-8mm-29347900.pdf?src-supplier=Conrad, ComponentLink3Description=https://datasheet.ciiva.com/41449/001172228-da-01-en-drossel-0603-600r-1-6x0-8mm-4000st-41449517.pdf?src-supplier=Conrad, ComponentLink3URL=https://datasheet.ciiva.com/41449/001172228-da-01-en-drossel-0603-600r-1-6x0-8mm-4000st-41449517.pdf?src-supplier=Conrad, ComponentLink4Description=https://datasheet.ciiva.com/1012/l0110s0100blm18a-1012018.pdf?src-supplier=Digi-Key, ComponentLink4URL=https://datasheet.ciiva.com/1012/l0110s0100blm18a-1012018.pdf?src-supplier=Digi-Key, ComponentLink5Description=https://datasheet.ciiva.com/1012/l0110s0100blm18a-1012019.pdf?src-supplier=Digi-Key, ComponentLink5URL=https://datasheet.ciiva.com/1012/l0110s0100blm18a-1012019.pdf?src-supplier=Digi-Key, ComponentLink6Description=https://datasheet.ciiva.com/1466/1756147-1466934.pdf?src-supplier=Element14, ComponentLink6URL=https://datasheet.ciiva.com/1466/1756147-1466934.pdf?src-supplier=Element14, ComponentLink7Description=https://datasheet.ciiva.com/3081/l0110s0100blm18a-3081613.pdf?src-supplier=Avnet, ComponentLink7URL=https://datasheet.ciiva.com/3081/l0110s0100blm18a-3081613.pdf?src-supplier=Avnet, ComponentLink8Description=https://datasheet.ciiva.com/1012/l0110s0100blm18a-1012017.pdf?src-supplier=Digi-Key, ComponentLink8URL=https://datasheet.ciiva.com/1012/l0110s0100blm18a-1012017.pdf?src-supplier=Digi-Key, ComponentLink9Description=https://datasheet.ciiva.com/1466/1756147-1466933.pdf?src-supplier=Element14, ComponentLink9URL=https://datasheet.ciiva.com/1466/1756147-1466933.pdf?src-supplier=Element14, ComponentLink10Description=https://datasheet.ciiva.com/16210/l0110s0100blm18a-16210006.pdf?src-supplier=Future+Electronics, ComponentLink10URL=https://datasheet.ciiva.com/16210/l0110s0100blm18a-16210006.pdf?src-supplier=Future+Electronics, Core Material=Ferrite, DC Current=500mA, Depth=0.8mm, Height=0.8mm, Impedance=600R, Lead Free="Lead Free", Length=1.6mm, Material=Steel, Max Current Rating=500mA, Max DC Current=500mA, Military Standard=Not, Number of Circuits=1, Number of Lines=1, Number of Pins=2, Packaging="Tape and Reel", Pricing 1="1 = 0,10000, 10 = 0,07900, 25 = 0,07200, 50 = 0,06480, 100 = 0,04760, 250 = 0,03460, 500 = 0,03170, 1000 = 0,02738 (USD)", Radiation Hardening=No, REACH SVHC="No SVHC", RoHS=Yes, Shielding=Unshielded, Stock 1=1151376, Supplier 1=Digi-Key, Termination=SMD/SMT, Test Frequency=100MHz, Weight=7.1E-05oz, Width=0.8mm
Fid1 Fid2 Fid3 Fid4: "Fiducial Mark", Part Number=Fid-Mark, Artikkelnr Noca=N.A., Artikkelnr Simpro=N.A., Footprint Doc=Fiducial, LatestRevisionDate=2009-12-12, Pin Count=1, Published=2009-12-12, Publisher="Nordic Semiconductor"
IC1: library part "TI TLA202x", "Integrated Circuit", Manufacturer="Texas Instruments", Manufacturer Part Number=TLA2024IRUGT, Max Operating Temperature=85°C, Min Operating Temperature=-40°C, Supplier Part Number 1=296-48346-1-ND, ComponentLink1Description=http://www.ti.com/lit/ds/symlink/tla2022.pdf?src-supplier=Farnell, ComponentLink1URL=http://www.ti.com/lit/ds/symlink/tla2022.pdf?src-supplier=Farnell, ComponentLink2Description=http://www.ti.com/lit/ds/symlink/tla2021.pdf?src-supplier=Digi-Key, ComponentLink2URL=http://www.ti.com/lit/ds/symlink/tla2021.pdf?src-supplier=Digi-Key, ComponentLink3Description=http://www.ti.com/general/docs/suppproductinfo.tsp?distId=10&amp;gotoUrl=http%3A%2F%2Fwww.ti.com%2Flit%2Fgpn%2Ftla2021&src-supplier=Digi-Key, ComponentLink3URL=http://www.ti.com/general/docs/suppproductinfo.tsp?distId=10&amp;gotoUrl=http%3A%2F%2Fwww.ti.com%2Flit%2Fgpn%2Ftla2021&src-supplier=Digi-Key, Interface=I2C, Number of A/D Converters=1, Number of Bits=12, Number of Inputs=4, Packaging="Cut Tape", Pricing 1="1 = 1,94000, 10 = 1,74400, 25 = 1,64520, 100 = 1,31600 (USD)", RoHS=No, Sampling Rate=3300S/s, Stock 1=5713, Supplier 1=Digi-Key
IC2: library part "SI LABS SI8602", Case/Package=SOIC, Isolated Power=No, Manufacturer="Silicon Labs", Manufacturer Part Number=SI8602AC-B-IS, Max Input Current=7.1mA, Max Operating Temperature=125°C, Max Power Dissipation=220mW, Max Supply Voltage=5.5V, Min Operating Temperature=-40°C, Min Supply Voltage=3V, Operating Supply Current=4.7mA, Supplier Part Number 1=336-2050-5-ND, Channel Type=Bidirectional, ComponentLink1Description=http://www.mouser.com/ds/2/368/Si860x-51606.pdf, ComponentLink1URL=http://www.mouser.com/ds/2/368/Si860x-51606.pdf, ComponentLink2Description=https://www.silabs.com/documents/public/data-sheets/Si860x.pdf, ComponentLink2URL=https://www.silabs.com/documents/public/data-sheets/Si860x.pdf, Data Rate=1.7Mbps, Depth=1.55mm, Length=5mm, Number of Channels=2, Number of Pins=8, Packaging=Rail/Tube, Polarity=Bidirectional,Unidirectional, Pricing 1="1 = 2,99000, 25 = 2,87920, 100 = 2,76850, 1000 = 2,51989 (USD)", Propagation Delay=55ns, REACH SVHC=Unknown, Rise Time=4ns, RoHS=Yes, Stock 1=2420, Supplier 1=Digi-Key, Weight=0.001764oz, Width=4mm